# Altium PCB PCB1.PcbDoc (part 2 of 3)
Units mil, origin at the board's own origin, x right, y up, seen from the top; angles counter-clockwise.
Board outline 2830 x 1100 mil, 4 copper layers (L1, L2, L3, L4), stack 61.583 mil thick; 64 components, 73 nets, 315 pads, 162 vias.
Unrouted connection lines stored in the file: 1.
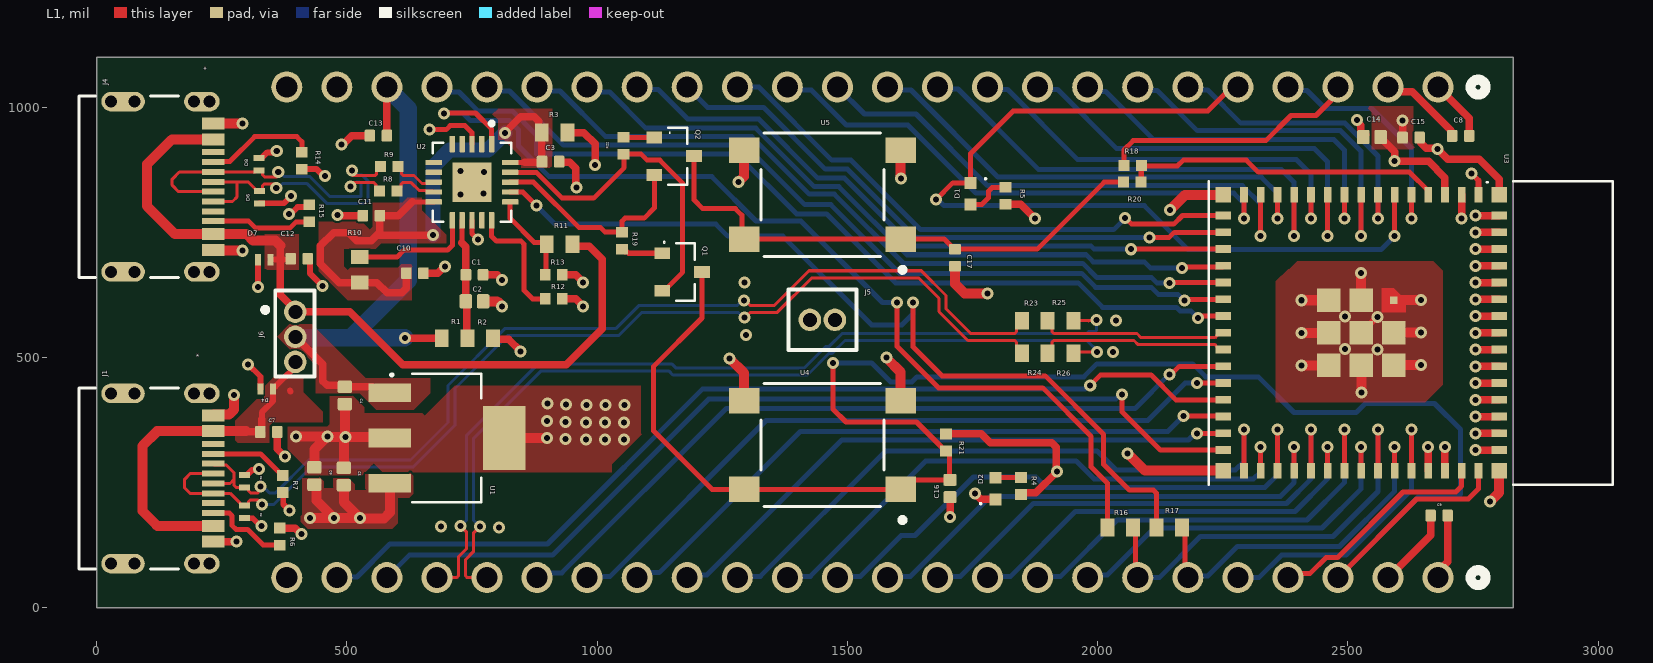
[diagram p0: L1 view]

## Part data (continued)
R8 R9 R18 R20: "62.5mW Thick Film Resistors 50V ±100ppm/℃ ±1% 27Ω 0402 Chip Resistor - Surface Mount ROHS", Case Code (Imperial)=0402, Case Code (Metric)=1005, Manufacturer="Yageo Group", Manufacturer Part Number=RC0402FR-0727RL, Manufacturer_Name=Yageo, Max Operating Temperature=155°C, Max Power Dissipation=63mW, Min Operating Temperature=-55°C, Power Rating=62.5mW, Resistance=27Ω, Temperature Coefficient=100ppm/°C, Tolerance=1%, Voltage Rating=50V, Case/Package=0402, Category="Chip SMD Resistors", China RoHS=Non-Compliant, ComponentLink1Description=https://datasheet.octopart.com:443/RC0402FR-0727RL-Yageo-datasheet-175887523.pdf?src-supplier=Newark, ComponentLink1URL=https://datasheet.octopart.com:443/RC0402FR-0727RL-Yageo-datasheet-175887523.pdf?src-supplier=Newark, ComponentLink2Description=https://datasheet.octopart.com:443/RC0402FR-0727RL-Yageo-datasheet-8324527.pdf?src-supplier=Newark, ComponentLink2URL=https://datasheet.octopart.com:443/RC0402FR-0727RL-Yageo-datasheet-8324527.pdf?src-supplier=Newark, ComponentLink3Description=https://datasheet.octopart.com:443/RC0402FR-0727RL-Yageo-datasheet-103092701.pdf?src-supplier=Upverter, ComponentLink3URL=https://datasheet.octopart.com:443/RC0402FR-0727RL-Yageo-datasheet-103092701.pdf?src-supplier=Upverter, ComponentLink4Description=https://datasheet.octopart.com:443/RC0402FR-0727RL-Yageo-datasheet-10408619.pdf?src-supplier=element14+APAC, ComponentLink4URL=https://datasheet.octopart.com:443/RC0402FR-0727RL-Yageo-datasheet-10408619.pdf?src-supplier=element14+APAC, ComponentLink5Description=https://datasheet.octopart.com:443/RC0402FR-0727RL-Yageo-datasheet-62067350.pdf?src-supplier=element14+APAC, ComponentLink5URL=https://datasheet.octopart.com:443/RC0402FR-0727RL-Yageo-datasheet-62067350.pdf?src-supplier=element14+APAC, ComponentLink6Description=https://datasheet.octopart.com:443/RC0402FR-0727RL-Yageo-Group-datasheet-189192902.pdf?src-supplier=LCSC, ComponentLink6URL=https://datasheet.octopart.com:443/RC0402FR-0727RL-Yageo-Group-datasheet-189192902.pdf?src-supplier=LCSC, ComponentLink7Description=https://datasheet.octopart.com:443/RC0402FR-0727RL-Yageo-Group-datasheet-176638170.pdf?src-supplier=Future+Electronics, ComponentLink7URL=https://datasheet.octopart.com:443/RC0402FR-0727RL-Yageo-Group-datasheet-176638170.pdf?src-supplier=Future+Electronics, ComponentLink8Description=https://datasheet.octopart.com:443/RC0402FR-0727RL-Yageo-datasheet-164759695.pdf?src-supplier=Future+Electronics, ComponentLink8URL=https://datasheet.octopart.com:443/RC0402FR-0727RL-Yageo-datasheet-164759695.pdf?src-supplier=Future+Electronics, ComponentLink9Description=https://datasheet.octopart.com:443/RC0402FR-0727RL-Yageo-datasheet-137700087.pdf?src-supplier=Future+Electronics, ComponentLink9URL=https://datasheet.octopart.com:443/RC0402FR-0727RL-Yageo-datasheet-137700087.pdf?src-supplier=Future+Electronics, ComponentLink10Description=https://datasheet.octopart.com:443/RC0402FR-0727RL-Yageo-datasheet-12531192.pdf?src-supplier=Future+Electronics, ComponentLink10URL=https://datasheet.octopart.com:443/RC0402FR-0727RL-Yageo-datasheet-12531192.pdf?src-supplier=Future+Electronics, ComponentLink11Description=https://datasheet.octopart.com:443/RC0402FR-0727RL-Yageo-datasheet-175423674.pdf?src-supplier=SOS+electronic, ComponentLink11URL=https://datasheet.octopart.com:443/RC0402FR-0727RL-Yageo-datasheet-175423674.pdf?src-supplier=SOS+electronic, ComponentLink12Description=https://datasheet.octopart.com:443/RC0402FR-0727RL-Yageo-datasheet-8329306.pdf?src-supplier=SOS+electronic, ComponentLink12URL=https://datasheet.octopart.com:443/RC0402FR-0727RL-Yageo-datasheet-8329306.pdf?src-supplier=SOS+electronic, ComponentLink13Description=https://datasheet.octopart.com:443/RC0402FR-0727RL-Yageo-datasheet-148775077.pdf?src-supplier=TME, ComponentLink13URL=https://datasheet.octopart.com:443/RC0402FR-0727RL-Yageo-datasheet-148775077.pdf?src-supplier=TME, ComponentLink14Description=https://datasheet.octopart.com/RC0402FR-0727RL-Yageo-datasheet-73766026.pdf, ComponentLink14URL=https://datasheet.octopart.com/RC0402FR-0727RL-Yageo-datasheet-73766026.pdf, ComponentLink15Description=http://sigma.octopart.com:80/conflict_mineral_statement/Yageo-company-3.pdf?src-supplier=Compliance+Statements, ComponentLink15URL=http://sigma.octopart.com:80/conflict_mineral_statement/Yageo-company-3.pdf?src-supplier=Compliance+Statements, ComponentLink16Description=http://sigma.octopart.com:80/rohs_statement/Yageo-company-2.pdf?src-supplier=Compliance+Statements, ComponentLink16URL=http://sigma.octopart.com:80/rohs_statement/Yageo-company-2.pdf?src-supplier=Compliance+Statements, Composition="Thick Film", Copyright="Copyright (C) 2025 Ultra Librarian. All rights reserved.", Country of Origin="Mainland China, Taiwan", Depth=500µm, Export Control Classification Number (ECCN) Code=EAR99, Features="Moisture Resistant", Harmonized Tariff Schedule (HTS) Code=8533.21.00.30, Height=350µm, Introduction Date=2008-07-18, Lead Free="Lead Free", Length=1mm, Lifecycle Status=Production, Manufacturer_Part_Number=RC0402FR-0727RL, Military Standard=Not, Mount="Surface Mount", Number of Pins=2, Number of Terminals=2, Number of Terminations=2, Pricing 1="100=0.004, 1000=0.004, 2000=0.003, 5000=0.003 (GBP)", REACH SVHC=Yes, RoHS=Compliant, Schedule B="8533210045, 8533210045|8533210045, 8533210045|8533210045|8533210045, 8533210045|8533210045|8533210045|8533210045", Stock 1=21500, Supplier 1=RS, Termination=SMD/SMT, Voltage Rating (AC)=50V, Voltage Rating (DC)=50V, Weight=652.039032µg, Width=500µm, Working Voltage=50V
R11: library part RC0402FR-074K7L, "4.7 kOhms ±1% 0.063W, 1/16W Chip Resistor 0402 (1005 Metric) Moisture Resistant Thick Film", Case Code (Imperial)=0402, Case Code (Metric)=1005, Manufacturer="Yageo Group", Max Operating Temperature=155°C, Min Operating Temperature=-55°C, Package="1005 Panasonic Electronic Components", Power Rating=62.5mW, Resistance=4.7kΩ, Supplier Part Number 1=1987816P, Temperature Coefficient=100ppm/°C, Tolerance=1%, Voltage Rating=50V, Case/Package=0402, Category="Chip SMD Resistors", Check_prices=https://www.snapeda.com/parts/RC0402FR-074K7L/Yageo/view-part/?ref=eda, China RoHS=Non-Compliant, ComponentLink1Description=https://datasheet.octopart.com:443/RC0402FR-074K7L-Yageo-datasheet-175887523.pdf?src-supplier=IHS, ComponentLink1URL=https://datasheet.octopart.com:443/RC0402FR-074K7L-Yageo-datasheet-175887523.pdf?src-supplier=IHS, ComponentLink2Description=https://datasheet.octopart.com:443/RC0402FR-074K7L-Yageo-datasheet-103092701.pdf?src-supplier=Upverter, ComponentLink2URL=https://datasheet.octopart.com:443/RC0402FR-074K7L-Yageo-datasheet-103092701.pdf?src-supplier=Upverter, ComponentLink3Description=https://datasheet.octopart.com:443/RC0402FR-074K7L-Yageo-datasheet-98239111.pdf?src-supplier=Upverter, ComponentLink3URL=https://datasheet.octopart.com:443/RC0402FR-074K7L-Yageo-datasheet-98239111.pdf?src-supplier=Upverter, ComponentLink4Description=https://datasheet.octopart.com:443/RC0402FR-074K7L-Yageo-Group-datasheet-190305687.pdf?src-supplier=Future+Electronics, ComponentLink4URL=https://datasheet.octopart.com:443/RC0402FR-074K7L-Yageo-Group-datasheet-190305687.pdf?src-supplier=Future+Electronics, ComponentLink5Description=https://datasheet.octopart.com:443/RC0402FR-074K7L-Yageo-datasheet-164759695.pdf?src-supplier=Future+Electronics, ComponentLink5URL=https://datasheet.octopart.com:443/RC0402FR-074K7L-Yageo-datasheet-164759695.pdf?src-supplier=Future+Electronics, ComponentLink6Description=https://datasheet.octopart.com:443/RC0402FR-074K7L-Yageo-datasheet-137700087.pdf?src-supplier=Future+Electronics, ComponentLink6URL=https://datasheet.octopart.com:443/RC0402FR-074K7L-Yageo-datasheet-137700087.pdf?src-supplier=Future+Electronics, ComponentLink7Description=https://datasheet.octopart.com:443/RC0402FR-074K7L-Yageo-datasheet-10408619.pdf?src-supplier=element14+APAC, ComponentLink7URL=https://datasheet.octopart.com:443/RC0402FR-074K7L-Yageo-datasheet-10408619.pdf?src-supplier=element14+APAC, ComponentLink8Description=https://datasheet.octopart.com:443/RC0402FR-074K7L-Yageo-datasheet-13691069.pdf?src-supplier=element14+APAC, ComponentLink8URL=https://datasheet.octopart.com:443/RC0402FR-074K7L-Yageo-datasheet-13691069.pdf?src-supplier=element14+APAC, ComponentLink9Description=https://datasheet.octopart.com:443/RC0402FR-074K7L-Yageo-datasheet-12531192.pdf?src-supplier=Newark, ComponentLink9URL=https://datasheet.octopart.com:443/RC0402FR-074K7L-Yageo-datasheet-12531192.pdf?src-supplier=Newark, ComponentLink10Description=https://datasheet.octopart.com:443/RC0402FR-074K7L-Yageo-datasheet-8324527.pdf?src-supplier=Newark, ComponentLink10URL=https://datasheet.octopart.com:443/RC0402FR-074K7L-Yageo-datasheet-8324527.pdf?src-supplier=Newark, ComponentLink11Description=https://datasheet.octopart.com:443/RC0402FR-074K7L-Yageo-Group-datasheet-190051977.pdf?src-supplier=Newark, ComponentLink11URL=https://datasheet.octopart.com:443/RC0402FR-074K7L-Yageo-Group-datasheet-190051977.pdf?src-supplier=Newark, ComponentLink12Description=https://datasheet.octopart.com:443/RC0402FR-074K7L-Yageo-datasheet-62067350.pdf?src-supplier=Farnell, ComponentLink12URL=https://datasheet.octopart.com:443/RC0402FR-074K7L-Yageo-datasheet-62067350.pdf?src-supplier=Farnell, ComponentLink13Description=https://datasheet.octopart.com:443/RC0402FR-074K7L-Yageo-datasheet-8329306.pdf?src-supplier=element14, ComponentLink13URL=https://datasheet.octopart.com:443/RC0402FR-074K7L-Yageo-datasheet-8329306.pdf?src-supplier=element14, ComponentLink14Description=https://datasheet.octopart.com:443/RC0402FR-074K7L-Yageo-Group-datasheet-189192902.pdf?src-supplier=LCSC, ComponentLink14URL=https://datasheet.octopart.com:443/RC0402FR-074K7L-Yageo-Group-datasheet-189192902.pdf?src-supplier=LCSC, ComponentLink15Description=https://datasheet.octopart.com:443/RC0402FR-074K7L-Yageo-datasheet-175423674.pdf?src-supplier=SOS+electronic, ComponentLink15URL=https://datasheet.octopart.com:443/RC0402FR-074K7L-Yageo-datasheet-175423674.pdf?src-supplier=SOS+electronic, ComponentLink16Description=https://datasheet.octopart.com:443/RC0402FR-074K7L-Yageo-datasheet-79472498.pdf?src-supplier=Megastar, ComponentLink16URL=https://datasheet.octopart.com:443/RC0402FR-074K7L-Yageo-datasheet-79472498.pdf?src-supplier=Megastar, ComponentLink17Description=https://datasheet.octopart.com/RC0402FR-074K7L-Yageo-datasheet-73766026.pdf, ComponentLink17URL=https://datasheet.octopart.com/RC0402FR-074K7L-Yageo-datasheet-73766026.pdf, ComponentLink18Description=http://sigma.octopart.com:80/conflict_mineral_statement/Yageo-company-3.pdf?src-supplier=Compliance+Statements, ComponentLink18URL=http://sigma.octopart.com:80/conflict_mineral_statement/Yageo-company-3.pdf?src-supplier=Compliance+Statements, ComponentLink19Description=http://sigma.octopart.com:80/rohs_statement/Yageo-company-2.pdf?src-supplier=Compliance+Statements, ComponentLink19URL=http://sigma.octopart.com:80/rohs_statement/Yageo-company-2.pdf?src-supplier=Compliance+Statements, Composition="Thick Film", Country of Origin="Mainland China, Taiwan", Depth=500µm, Export Control Classification Number (ECCN) Code=EAR99, Harmonized Tariff Schedule (HTS) Code=8533.21.00.30, Height=350µm, Introduction Date=2008-07-18, Lead Free="Lead Free", Length=1mm, Lifecycle Status=Production, Manufacturer Part Number=RC0402FR-074K7L, MF=Yageo, Military Standard=Not, Mount="Surface Mount", MP=RC0402FR-074K7L, Number of Pins=2, Number of Terminals=2, Packaging="Tape & Reel", Pricing 1="500=0.004, 1000=0.004, 2500=0.003, 5000=0.003 (GBP)", REACH SVHC=Yes, RoHS=Compliant, Schedule B="8533210045, 8533210045|8533210045, 8533210045|8533210045|8533210045, 8533210045|8533210045|8533210045|8533210045", SnapEDA_Link=https://www.snapeda.com/parts/RC0402FR-074K7L/Yageo/view-part/?ref=snap, Stock 1=5100, Supplier 1=RS, Termination=SMD/SMT, Voltage Rating (AC)=50V, Voltage Rating (DC)=50V, Width=500µm, Working Voltage=50V
R12 R13 R19 R22: library part AC0402FR-0710KL, "Res Thick Film 0402 10K Ohm 1% 0.063W(1/16W) ±100ppm/C Pad SMD T/R Automotive AEC-Q200", Case Code (Imperial)=0402, Case Code (Metric)=1005, Manufacturer="Yageo Group", Max Operating Temperature=155°C, Max Power Dissipation=63mW, Min Operating Temperature=-55°C, Package="1005 Yageo", Power Rating=62.5mW, Ratings=AEC-Q200, Resistance=10kΩ, Supplier Part Number 1=1977966P, Temperature Coefficient=100ppm/°C, Tolerance=1%, Voltage Rating=50V, Case/Package=0402, Category="Chip SMD Resistors", Check_prices=https://www.snapeda.com/parts/AC0402FR-0710KL/Yageo/view-part/?ref=eda, China RoHS=Non-Compliant, ComponentLink1Description=https://datasheet.octopart.com:443/AC0402FR-0710KL-Yageo-datasheet-182189377.pdf?src-supplier=IHS, ComponentLink1URL=https://datasheet.octopart.com:443/AC0402FR-0710KL-Yageo-datasheet-182189377.pdf?src-supplier=IHS, ComponentLink2Description=https://datasheet.octopart.com:443/AC0402FR-0710KL-Yageo-datasheet-83209224.pdf?src-supplier=Upverter, ComponentLink2URL=https://datasheet.octopart.com:443/AC0402FR-0710KL-Yageo-datasheet-83209224.pdf?src-supplier=Upverter, ComponentLink3Description=https://datasheet.octopart.com:443/AC0402FR-0710KL-Yageo-datasheet-178509465.pdf?src-supplier=Newark, ComponentLink3URL=https://datasheet.octopart.com:443/AC0402FR-0710KL-Yageo-datasheet-178509465.pdf?src-supplier=Newark, ComponentLink4Description=https://datasheet.octopart.com:443/AC0402FR-0710KL-Yageo-datasheet-166720450.pdf?src-supplier=JRH+Electronics, ComponentLink4URL=https://datasheet.octopart.com:443/AC0402FR-0710KL-Yageo-datasheet-166720450.pdf?src-supplier=JRH+Electronics, ComponentLink5Description=https://datasheet.octopart.com:443/AC0402FR-0710KL-Yageo-datasheet-151884373.pdf?src-supplier=Future+Electronics, ComponentLink5URL=https://datasheet.octopart.com:443/AC0402FR-0710KL-Yageo-datasheet-151884373.pdf?src-supplier=Future+Electronics, ComponentLink6Description=https://datasheet.octopart.com:443/AC0402FR-0710KL-Yageo-Group-datasheet-189830439.pdf?src-supplier=Future+Electronics, ComponentLink6URL=https://datasheet.octopart.com:443/AC0402FR-0710KL-Yageo-Group-datasheet-189830439.pdf?src-supplier=Future+Electronics, ComponentLink7Description=https://datasheet.octopart.com:443/AC0402FR-0710KL-Yageo-datasheet-137699919.pdf?src-supplier=Future+Electronics, ComponentLink7URL=https://datasheet.octopart.com:443/AC0402FR-0710KL-Yageo-datasheet-137699919.pdf?src-supplier=Future+Electronics, ComponentLink8Description=https://datasheet.octopart.com:443/AC0402FR-0710KL-Yageo-datasheet-24580492.pdf?src-supplier=Future+Electronics, ComponentLink8URL=https://datasheet.octopart.com:443/AC0402FR-0710KL-Yageo-datasheet-24580492.pdf?src-supplier=Future+Electronics, ComponentLink9Description=https://datasheet.octopart.com:443/AC0402FR-0710KL-Yageo-datasheet-13029202.pdf?src-supplier=Future+Electronics, ComponentLink9URL=https://datasheet.octopart.com:443/AC0402FR-0710KL-Yageo-datasheet-13029202.pdf?src-supplier=Future+Electronics, ComponentLink10Description=https://datasheet.octopart.com/AC0402FR-0710KL-Yageo-datasheet-12512238.pdf, ComponentLink10URL=https://datasheet.octopart.com/AC0402FR-0710KL-Yageo-datasheet-12512238.pdf, ComponentLink11Description=https://datasheet.octopart.com:443/AC0402FR-0710KL-Yageo-Group-datasheet-164768995.pdf?src-supplier=ODG+(Origin+Data+Global), ComponentLink11URL=https://datasheet.octopart.com:443/AC0402FR-0710KL-Yageo-Group-datasheet-164768995.pdf?src-supplier=ODG+(Origin+Data+Global), ComponentLink12Description=https://datasheet.octopart.com:443/AC0402FR-0710KL-Yageo-datasheet-128677448.pdf?src-supplier=X-ON, ComponentLink12URL=https://datasheet.octopart.com:443/AC0402FR-0710KL-Yageo-datasheet-128677448.pdf?src-supplier=X-ON, ComponentLink13Description=http://sigma.octopart.com:80/conflict_mineral_statement/Yageo-company-3.pdf?src-supplier=Compliance+Statements, ComponentLink13URL=http://sigma.octopart.com:80/conflict_mineral_statement/Yageo-company-3.pdf?src-supplier=Compliance+Statements, ComponentLink14Description=http://sigma.octopart.com:80/rohs_statement/Yageo-company-2.pdf?src-supplier=Compliance+Statements, ComponentLink14URL=http://sigma.octopart.com:80/rohs_statement/Yageo-company-2.pdf?src-supplier=Compliance+Statements, Composition="Thick Film", Country of Origin="Mainland China, Taiwan", Depth=500µm, Digi-Key_Part_Number=YAG3436TR-ND, Export Control Classification Number (ECCN) Code=EAR99, Features="Automotive AEC-Q200, Moisture Resistant", Harmonized Tariff Schedule (HTS) Code=8533.21.00.30, Height=320µm, Introduction Date=2012-04-10, Lead Free="Lead Free", Length=1mm, Lifecycle Status=Production, Manufacturer Part Number=AC0402FR-0710KL, MF=Yageo, Military Standard=Not, Mount="Surface Mount", MP=AC0402FR-0710KL, Number of Terminals=2, Number of Terminations=2, Packaging="Tape & Reel", Pricing 1="1000=0.004, 2500=0.003, 5000=0.003 (GBP)", Purchase-URL=https://pricing.snapeda.com/search/part/AC0402FR-0710KL/?ref=eda, REACH SVHC=Yes, RoHS=Compliant, Schedule B="8533210045, 8533210045|8533210045|8533210045|8533210045|8533210045|8533210045|8533210045|8533210045|8533210045|8533210045|8533210045|8533210045|8533210045|8533210045|8533210045|8533210045|8533210045|8533210045|8533210045, 8533210045|8533210045|8533210045|8533210045|8533210045|8533210045|8533210045|8533210045|8533210045|8533210045|8533210045|8533210045|8533210045|8533210045|8533210045|8533210045|8533210045|8533210045|8533210045|8533210045|8533210045|8533210045|8533210045|85", SnapEDA_Link=https://www.snapeda.com/parts/AC0402FR-0710KL/Yageo/view-part/?ref=snap, Stock 1=244500, Supplier 1=RS, Termination=SMD/SMT, Width=500µm, Working Voltage=50V
R21: "Res Thick Film 0402 10K Ohm 1% 0.063W(1/16W) ±100ppm/C Pad SMD T/R Automotive AEC-Q200", Case Code (Imperial)=0402, Case Code (Metric)=1005, Manufacturer="Yageo Group", Manufacturer Part Number=AC0402FR-0710KL, Max Operating Temperature=155°C, Max Power Dissipation=63mW, Min Operating Temperature=-55°C, Package="1005 Yageo", Power Rating=62.5mW, Ratings=AEC-Q200, Resistance=10kΩ, Temperature Coefficient=100ppm/°C, Tolerance=1%, Voltage Rating=50V, Case/Package=0402, Category="Chip SMD Resistors", Check_prices=https://www.snapeda.com/parts/AC0402FR-0710KL/Yageo/view-part/?ref=eda, China RoHS=Non-Compliant, ComponentLink1Description=https://datasheet.octopart.com:443/AC0402FR-0710KL-Yageo-datasheet-182189377.pdf?src-supplier=IHS, ComponentLink1URL=https://datasheet.octopart.com:443/AC0402FR-0710KL-Yageo-datasheet-182189377.pdf?src-supplier=IHS, ComponentLink2Description=https://datasheet.octopart.com:443/AC0402FR-0710KL-Yageo-datasheet-83209224.pdf?src-supplier=Upverter, ComponentLink2URL=https://datasheet.octopart.com:443/AC0402FR-0710KL-Yageo-datasheet-83209224.pdf?src-supplier=Upverter, ComponentLink3Description=https://datasheet.octopart.com:443/AC0402FR-0710KL-Yageo-datasheet-178509465.pdf?src-supplier=Newark, ComponentLink3URL=https://datasheet.octopart.com:443/AC0402FR-0710KL-Yageo-datasheet-178509465.pdf?src-supplier=Newark, ComponentLink4Description=https://datasheet.octopart.com:443/AC0402FR-0710KL-Yageo-datasheet-166720450.pdf?src-supplier=JRH+Electronics, ComponentLink4URL=https://datasheet.octopart.com:443/AC0402FR-0710KL-Yageo-datasheet-166720450.pdf?src-supplier=JRH+Electronics, ComponentLink5Description=https://datasheet.octopart.com:443/AC0402FR-0710KL-Yageo-datasheet-151884373.pdf?src-supplier=Future+Electronics, ComponentLink5URL=https://datasheet.octopart.com:443/AC0402FR-0710KL-Yageo-datasheet-151884373.pdf?src-supplier=Future+Electronics, ComponentLink6Description=https://datasheet.octopart.com:443/AC0402FR-0710KL-Yageo-Group-datasheet-189830439.pdf?src-supplier=Future+Electronics, ComponentLink6URL=https://datasheet.octopart.com:443/AC0402FR-0710KL-Yageo-Group-datasheet-189830439.pdf?src-supplier=Future+Electronics, ComponentLink7Description=https://datasheet.octopart.com:443/AC0402FR-0710KL-Yageo-datasheet-137699919.pdf?src-supplier=Future+Electronics, ComponentLink7URL=https://datasheet.octopart.com:443/AC0402FR-0710KL-Yageo-datasheet-137699919.pdf?src-supplier=Future+Electronics, ComponentLink8Description=https://datasheet.octopart.com:443/AC0402FR-0710KL-Yageo-datasheet-24580492.pdf?src-supplier=Future+Electronics, ComponentLink8URL=https://datasheet.octopart.com:443/AC0402FR-0710KL-Yageo-datasheet-24580492.pdf?src-supplier=Future+Electronics, ComponentLink9Description=https://datasheet.octopart.com:443/AC0402FR-0710KL-Yageo-datasheet-13029202.pdf?src-supplier=Future+Electronics, ComponentLink9URL=https://datasheet.octopart.com:443/AC0402FR-0710KL-Yageo-datasheet-13029202.pdf?src-supplier=Future+Electronics, ComponentLink10Description=https://datasheet.octopart.com/AC0402FR-0710KL-Yageo-datasheet-12512238.pdf, ComponentLink10URL=https://datasheet.octopart.com/AC0402FR-0710KL-Yageo-datasheet-12512238.pdf, ComponentLink11Description=https://datasheet.octopart.com:443/AC0402FR-0710KL-Yageo-Group-datasheet-164768995.pdf?src-supplier=ODG+(Origin+Data+Global), ComponentLink11URL=https://datasheet.octopart.com:443/AC0402FR-0710KL-Yageo-Group-datasheet-164768995.pdf?src-supplier=ODG+(Origin+Data+Global), ComponentLink12Description=https://datasheet.octopart.com:443/AC0402FR-0710KL-Yageo-datasheet-128677448.pdf?src-supplier=X-ON, ComponentLink12URL=https://datasheet.octopart.com:443/AC0402FR-0710KL-Yageo-datasheet-128677448.pdf?src-supplier=X-ON, ComponentLink13Description=http://sigma.octopart.com:80/conflict_mineral_statement/Yageo-company-3.pdf?src-supplier=Compliance+Statements, ComponentLink13URL=http://sigma.octopart.com:80/conflict_mineral_statement/Yageo-company-3.pdf?src-supplier=Compliance+Statements, ComponentLink14Description=http://sigma.octopart.com:80/rohs_statement/Yageo-company-2.pdf?src-supplier=Compliance+Statements, ComponentLink14URL=http://sigma.octopart.com:80/rohs_statement/Yageo-company-2.pdf?src-supplier=Compliance+Statements, Composition="Thick Film", Country of Origin="Mainland China, Taiwan", Depth=500µm, Digi-Key_Part_Number=YAG3436TR-ND, Export Control Classification Number (ECCN) Code=EAR99, Features="Automotive AEC-Q200, Moisture Resistant", Harmonized Tariff Schedule (HTS) Code=8533.21.00.30, Height=320µm, Introduction Date=2012-04-10, Lead Free="Lead Free", Length=1mm, Lifecycle Status=Production, MF=Yageo, Military Standard=Not, Mount="Surface Mount", MP=AC0402FR-0710KL, Number of Terminals=2, Number of Terminations=2, Packaging="Tape & Reel", Pricing 1="1000=0.004, 2500=0.003, 5000=0.003 (GBP)", Purchase-URL=https://pricing.snapeda.com/search/part/AC0402FR-0710KL/?ref=eda, REACH SVHC=Yes, RoHS=Compliant, Schedule B="8533210045, 8533210045|8533210045|8533210045|8533210045|8533210045|8533210045|8533210045|8533210045|8533210045|8533210045|8533210045|8533210045|8533210045|8533210045|8533210045|8533210045|8533210045|8533210045|8533210045, 8533210045|8533210045|8533210045|8533210045|8533210045|8533210045|8533210045|8533210045|8533210045|8533210045|8533210045|8533210045|8533210045|8533210045|8533210045|8533210045|8533210045|8533210045|8533210045|8533210045|8533210045|8533210045|8533210045|85", SnapEDA_Link=https://www.snapeda.com/parts/AC0402FR-0710KL/Yageo/view-part/?ref=snap, Stock 1=244500, Supplier 1=RS, Termination=SMD/SMT, Width=500µm, Working Voltage=50V
U1: library part "Buck Converter-TL1963A-33DCYR", "1.5-A, 20-V, low-dropout voltage regulator with reverse current & reverse voltage protection", Case/Package=SOT-223, Dropout Voltage=340mV, Input Bias Current=1mA, Manufacturer="Texas Instruments", Manufacturer Lifecycle Status=ACTIVE, Max Input Voltage=20V, Max Operating Temperature=125°C, Max Output Current=1.5A, Max Output Voltage=3.3V, Min Current Limit=1.6A, Min Input Voltage=2.1V, Min Operating Temperature=-40°C, Package="SOT-223-4 Texas Instruments", Accuracy=3%, Category="LDO Voltage Regulators", Check_prices=https://www.snapeda.com/parts/TL1963A-33DCYR/Texas+Instruments/view-part/?ref=eda, ComponentLink1Description=https://datasheet.octopart.com:443/TL1963A-33DCYR-Texas-Instruments-datasheet-36835243.pdf?src-supplier=Texas+Instruments, ComponentLink1URL=https://datasheet.octopart.com:443/TL1963A-33DCYR-Texas-Instruments-datasheet-36835243.pdf?src-supplier=Texas+Instruments, ComponentLink2Description=https://octopart.com:443/opatz8j6/c1?t=Hla6m3XvXhAHWXVKFaaW_a5X2t9MRnRa9Rhg32bB7-hwkC5kX9UWqgC7Y0XrYvGCzNw9F2GObv8rEO-_LT96r6t0WMtukZN5Zo-nq_t87TxK0aQbKY91dBY4VT4MYi1Trr0EtuGG53Jf1i-uWVif2ew3d4RaOZdf2PvGRtwv9uNs8uUNic6RvMbd-eB31s7G4Af3zS_TEzGuMkBAOoi9md3ZWSInE29ONXSk8OqzIHhpOUXvcDzV6Hao5nUAphUde-AL1MLKmQaW4RGiw94fQFK4e-Tgx16sbdcLKFmZowjD_ELyKtjWJkkBJ5BqY-LGJ7enmvKDFx3mRFCAvZkcEEaPzY6WYb0LtuKFQJ6UuQNRqLPd-hOLSDp-cdVvlre_9DiWJlg&src-supplier=Texas+Instruments, ComponentLink2URL=https://octopart.com:443/opatz8j6/c1?t=Hla6m3XvXhAHWXVKFaaW_a5X2t9MRnRa9Rhg32bB7-hwkC5kX9UWqgC7Y0XrYvGCzNw9F2GObv8rEO-_LT96r6t0WMtukZN5Zo-nq_t87TxK0aQbKY91dBY4VT4MYi1Trr0EtuGG53Jf1i-uWVif2ew3d4RaOZdf2PvGRtwv9uNs8uUNic6RvMbd-eB31s7G4Af3zS_TEzGuMkBAOoi9md3ZWSInE29ONXSk8OqzIHhpOUXvcDzV6Hao5nUAphUde-AL1MLKmQaW4RGiw94fQFK4e-Tgx16sbdcLKFmZowjD_ELyKtjWJkkBJ5BqY-LGJ7enmvKDFx3mRFCAvZkcEEaPzY6WYb0LtuKFQJ6UuQNRqLPd-hOLSDp-cdVvlre_9DiWJlg&src-supplier=Texas+Instruments, ComponentLink3Description=https://datasheet.octopart.com:443/TL1963A-33DCYR-Texas-Instruments-datasheet-10255270.pdf?src-supplier=Texas+Instruments, ComponentLink3URL=https://datasheet.octopart.com:443/TL1963A-33DCYR-Texas-Instruments-datasheet-10255270.pdf?src-supplier=Texas+Instruments, ComponentLink4Description=https://sigma.octopart.com:443/49253063/technical_drawing/Texas-Instruments-TL1963A-33DCYR.pdf?src-supplier=Texas+Instruments, ComponentLink4URL=https://sigma.octopart.com:443/49253063/technical_drawing/Texas-Instruments-TL1963A-33DCYR.pdf?src-supplier=Texas+Instruments, ComponentLink5Description=https://datasheet.octopart.com:443/TL1963A-33DCYR-Texas-Instruments-datasheet-159117591.pdf?src-supplier=Augswan, ComponentLink5URL=https://datasheet.octopart.com:443/TL1963A-33DCYR-Texas-Instruments-datasheet-159117591.pdf?src-supplier=Augswan, ComponentLink6Description=https://datasheet.octopart.com:443/TL1963A-33DCYR-Texas-Instruments-datasheet-21820479.pdf?src-supplier=Newark, ComponentLink6URL=https://datasheet.octopart.com:443/TL1963A-33DCYR-Texas-Instruments-datasheet-21820479.pdf?src-supplier=Newark, ComponentLink7Description=https://datasheet.octopart.com:443/TL1963A-33DCYR-Texas-Instruments-datasheet-16079880.pdf?src-supplier=Farnell, ComponentLink7URL=https://datasheet.octopart.com:443/TL1963A-33DCYR-Texas-Instruments-datasheet-16079880.pdf?src-supplier=Farnell, ComponentLink8Description=https://datasheet.octopart.com:443/TL1963A-33DCYR-Texas-Instruments-datasheet-14171511.pdf?src-supplier=iiiC, ComponentLink8URL=https://datasheet.octopart.com:443/TL1963A-33DCYR-Texas-Instruments-datasheet-14171511.pdf?src-supplier=iiiC, ComponentLink9Description=http://sigma.octopart.com:80/reach_statement/Texas-Instruments-company-64.pdf?src-supplier=Compliance+Statements, ComponentLink9URL=http://sigma.octopart.com:80/reach_statement/Texas-Instruments-company-64.pdf?src-supplier=Compliance+Statements, ComponentLink10Description=http://sigma.octopart.com:80/conflict_mineral_statement/Texas-Instruments-company-63.pdf?src-supplier=Compliance+Statements, ComponentLink10URL=http://sigma.octopart.com:80/conflict_mineral_statement/Texas-Instruments-company-63.pdf?src-supplier=Compliance+Statements, Contact Plating=Tin, Height=1.8mm, Lead Free="Lead Free", Length=6.5mm, Lifecycle Status=Production, Manufacturer Part Number=TL1963A-33DCYR, MF="Texas Instruments", Min Output Voltage=3.3V, MP=TL1963A-33DCYR, Nominal Output Voltage=3.3V, Number of Outputs=1, Number of Pins=4, Number of Regulators=1, Output Current=1.5A, Output Type=Fixed, Output Voltage=3.3V, Polarity=Positive, Pricing 1="2500=1.667 (USD)", Quiescent Current=1mA, Radiation Hardening=No, REACH SVHC=No, RoHS=Compliant, Schedule B="8542390000, 8542390000|8542390000|8542390000|8542390000|8542390000", SnapEDA_Link=https://www.snapeda.com/parts/TL1963A-33DCYR/Texas+Instruments/view-part/?ref=snap, Stock 1=20000, Supplier 1="Arrow Electronics", Thickness=1.6mm, Width=3.5mm
U2: library part "USB to UART", "IC USB SERIAL FULL UART 20QFN", Package=None, Availability=Unavailable, MP=FT231XQ-R, Price=None
U3: "ESP32-S3-MINI-1-N8 RF TXRX MOD BT WIFI PCB TH SMD", Manufacturer="Espressif Systems", Package=None, Supplier Part Number 1=5407-ESP32-S3-MINI-1-N8CT-ND, Availability=Unavailable, Category="RF Transceiver Modules and Modems", ComponentLink1Description=https://datasheet.octopart.com:443/ESP32-S3-MINI-1-N8-Espressif-Systems-datasheet-194171672.pdf?src-supplier=LCSC, ComponentLink1URL=https://datasheet.octopart.com:443/ESP32-S3-MINI-1-N8-Espressif-Systems-datasheet-194171672.pdf?src-supplier=LCSC, ComponentLink2Description=https://datasheet.octopart.com:443/ESP32-S3-MINI-1-N8-Espressif-Systems-datasheet-188867343.pdf?src-supplier=TME, ComponentLink2URL=https://datasheet.octopart.com:443/ESP32-S3-MINI-1-N8-Espressif-Systems-datasheet-188867343.pdf?src-supplier=TME, ComponentLink3Description=https://datasheet.octopart.com:443/ESP32-S3-MINI-1-N8-Espressif-Systems-datasheet-165560562.pdf?src-supplier=TME, ComponentLink3URL=https://datasheet.octopart.com:443/ESP32-S3-MINI-1-N8-Espressif-Systems-datasheet-165560562.pdf?src-supplier=TME, ComponentLink4Description=https://datasheet.octopart.com:443/ESP32-S3-MINI-1-N8-Espressif-Systems-datasheet-165560559.pdf?src-supplier=TME, ComponentLink4URL=https://datasheet.octopart.com:443/ESP32-S3-MINI-1-N8-Espressif-Systems-datasheet-165560559.pdf?src-supplier=TME, ComponentLink5Description=https://datasheet.octopart.com:443/ESP32-S3-MINI-1-N8-Espressif-Systems-datasheet-192318068.pdf?src-supplier=HQonline, ComponentLink5URL=https://datasheet.octopart.com:443/ESP32-S3-MINI-1-N8-Espressif-Systems-datasheet-192318068.pdf?src-supplier=HQonline, Manufacturer Part Number=ESP32-S3-MINI-1-N8, MF="{'manufacturer': u'Espressif Systems'}", MP=ESP32-S3-MINI-1-N8, Price=None, Pricing 1="1=5.43, 10=4.703, 25=4.4492, 100=4.0995, 250=3.89008 (USD)", RoHS=Compliant, Stock 1=4415, Supplier 1=DigiKey
U4 U5: library part Switch, "Switch Tactile N.O SPST Round Button Gull Wing 0.05A 12VDC 100000Cycle 1.57N SMD T/R", Case/Package=SMD/SMT, Color=Black, Contact Current Rating=50mA, Contact Resistance=100mΩ, Insulation Resistance=100GΩ, Manufacturer="C&K Components", Max Operating Temperature=60°C, Max Voltage Rating (DC)=12V, Min Operating Temperature=-20°C, Operating Force=1.57N, Actuator Length=850µm, Actuator Material="Nylon, Polyamide", Category="Tactile Switches", China RoHS=Compliant, ComponentLink1Description=https://datasheet.octopart.com:443/PTS645SM43SMTR92LFS-C%26K-Components-datasheet-169841344.pdf?src-supplier=Newark, ComponentLink1URL=https://datasheet.octopart.com:443/PTS645SM43SMTR92LFS-C%26K-Components-datasheet-169841344.pdf?src-supplier=Newark, ComponentLink2Description=https://datasheet.octopart.com:443/PTS645SM43SMTR92LFS-C%26K-Components-datasheet-41191814.pdf?src-supplier=Newark, ComponentLink2URL=https://datasheet.octopart.com:443/PTS645SM43SMTR92LFS-C%26K-Components-datasheet-41191814.pdf?src-supplier=Newark, ComponentLink3Description=https://datasheet.octopart.com:443/PTS645SM43SMTR92LFS-C%26K-Components-datasheet-67873720.pdf?src-supplier=Upverter, ComponentLink3URL=https://datasheet.octopart.com:443/PTS645SM43SMTR92LFS-C%26K-Components-datasheet-67873720.pdf?src-supplier=Upverter, ComponentLink4Description=https://datasheet.octopart.com:443/PTS645SM43SMTR92-LFS-C%26K-Components-datasheet-39117004.pdf?src-supplier=Upverter, ComponentLink4URL=https://datasheet.octopart.com:443/PTS645SM43SMTR92-LFS-C%26K-Components-datasheet-39117004.pdf?src-supplier=Upverter, ComponentLink5Description=https://datasheet.octopart.com:443/PTS645SM43SMTR92LFS-C%26K-Components-datasheet-165782998.pdf?src-supplier=Farnell, ComponentLink5URL=https://datasheet.octopart.com:443/PTS645SM43SMTR92LFS-C%26K-Components-datasheet-165782998.pdf?src-supplier=Farnell, ComponentLink6Description=https://datasheet.octopart.com:443/PTS645SM43SMTR92LFS-C%26K-Components-datasheet-110647872.pdf?src-supplier=HQonline, ComponentLink6URL=https://datasheet.octopart.com:443/PTS645SM43SMTR92LFS-C%26K-Components-datasheet-110647872.pdf?src-supplier=HQonline, ComponentLink7Description=https://datasheet.octopart.com:443/PTS645SM43SMTR92LFS-C%26K-Components-datasheet-24578962.pdf?src-supplier=Future+Electronics, ComponentLink7URL=https://datasheet.octopart.com:443/PTS645SM43SMTR92LFS-C%26K-Components-datasheet-24578962.pdf?src-supplier=Future+Electronics, ComponentLink8Description=https://datasheet.octopart.com:443/PTS645SM43SMTR92LFS-C%26K-Components-datasheet-138128951.pdf?src-supplier=Future+Electronics, ComponentLink8URL=https://datasheet.octopart.com:443/PTS645SM43SMTR92LFS-C%26K-Components-datasheet-138128951.pdf?src-supplier=Future+Electronics, ComponentLink9Description=https://datasheet.octopart.com:443/PTS645SM43SMTR92LFS-C%26K-Components-datasheet-62111174.pdf?src-supplier=Future+Electronics, ComponentLink9URL=https://datasheet.octopart.com:443/PTS645SM43SMTR92LFS-C%26K-Components-datasheet-62111174.pdf?src-supplier=Future+Electronics, ComponentLink10Description=https://datasheet.octopart.com:443/PTS645SM43SMTR92-LFS-C%26K-Components-datasheet-5331042.pdf?src-supplier=Future+Electronics, ComponentLink10URL=https://datasheet.octopart.com:443/PTS645SM43SMTR92-LFS-C%26K-Components-datasheet-5331042.pdf?src-supplier=Future+Electronics, ComponentLink11Description=https://datasheet.octopart.com:443/PTS645SM43SMTR92LFS-C%26K-Components-datasheet-62111384.pdf?src-supplier=Electro+Sonic, ComponentLink11URL=https://datasheet.octopart.com:443/PTS645SM43SMTR92LFS-C%26K-Components-datasheet-62111384.pdf?src-supplier=Electro+Sonic, ComponentLink12Description=https://datasheet.octopart.com:443/PTS645SM43SMTR92-LFS-C%26K-Components-datasheet-23707823.pdf?src-supplier=Electro+Sonic, ComponentLink12URL=https://datasheet.octopart.com:443/PTS645SM43SMTR92-LFS-C%26K-Components-datasheet-23707823.pdf?src-supplier=Electro+Sonic, ComponentLink13Description=https://datasheet.octopart.com:443/PTS645SM43SMTR92LFS-C%26K-Components-datasheet-44395798.pdf?src-supplier=Electro+Sonic, ComponentLink13URL=https://datasheet.octopart.com:443/PTS645SM43SMTR92LFS-C%26K-Components-datasheet-44395798.pdf?src-supplier=Electro+Sonic, ComponentLink14Description=http://sigma.octopart.com:80/reach_statement/ITT-company-18.pdf?src-supplier=Compliance+Statements, ComponentLink14URL=http://sigma.octopart.com:80/reach_statement/ITT-company-18.pdf?src-supplier=Compliance+Statements, Contact Material=Silver, Contact Plating=Silver, Copyright="Copyright (C) 2026 Ultra Librarian. All rights reserved.", Current Rating=50mA, Depth=9mm, Electrical Life=100kcycles, Height=3.45mm, Illumination Type="Illuminated, Non-Illuminated", Lead Free="Lead Free", Length=6mm, Life (Cycles)=100kcycles, Lifecycle Status=Production, Manufacturer Package Identifier=PTS645SM43SMTR92LFS, Manufacturer Part Number=PTS645SM43SMTR92LFS, Manufacturer_Name="C&K Components", Manufacturer_Part_Number=PTS645SM43SMTR92LFS, Max Current Rating=50mA, Mechanical Life=100kcycles, Mount="Surface Mount", Number of Positions=1, Orientation=Straight, Packaging="Cut Tape (CT)", Pricing 1="1000=0.102, 3000=0.0993, 5000=0.0981, 20000=0.0948, 30000=0.0927 (USD)", REACH SVHC=Yes, RefDes=RefDes, RoHS=Compliant, Stock 1=358000, Supplier 1="Future Electronics", Switch Function=Off-Mom, Termination=Solder, Throw Configuration=SPST, Type=Type, Voltage Rating (DC)=12V

## Via types
v1: diameter 24, hole 12, L1 to L4, tented both sides, 162 vias

## Nets (pads, with @x,y where several pads share a name; then routed paths per layer and width w, separated by ;. In a path a pad name is that pad's centre, name@x,y a point inside that pad or via, vN(x,y) a via of type N, cw(c..) or ccw(c..) an arc to the next point about the centre after c; other vN are vias at no path point)
+3V3: C8.2 C9.2 C14.2 C15.2 J2.2 J3.1 J5.2 R2.1 R3.2 R4.2 R5.2 R21.2 U3.3 | length 5504.1
  L1 w15: R2.1 796.46,538 798.46,536 823,536 v1(847,512) ; R3.2@940.59,948.83 973.46,948.83 996,926.29 v1(996,884) ; R21.2 1766.99,347.01 1785,329 1908.49,329 1917.28,320.21 1917.28,273.72 v1(1919,272) 1876.2,229.2 1850.13,229.2 R4.2 ; R5.2 1845.93,806.07 v1(1875,777) ; C14.2 2565.28,938.43 2593,910.71 v1(2593,892) 2661,892 2693.73,859.27 U3.3 ; J2.2 2588.99,1031.01 2627.99,1031.01 2704.86,954.14 2704.86,945.49 C8.2 ; C15.2 v1(2609,973) ; J3.1 2680,72.72 2699.01,91.73 C9.2
  L2 w40: v1(847,512) 847,676 919.43,748.43 919.43,859.02 944.41,884 v1(996,884) 1145.46,884 1147.46,886 1514,886 1627,773 1817,773 ; J5.2 1475,886 ; v1(1919,272) 1919,597 1817,699 1817,773 ; J2.2 2580,1034.05 2610,1004.05 ; v1(2609,973) 2610,974 2610,1004.05 ; J3.1 2481,259 2283.43,259 2239,303.43 2239,892 ; 1817,773 1871,773 v1(1875,777) 1990,892 2239,892 ; 2239,892 v1(2593,892) 2610,909 2610,1004.05
+3V3_FTDI: C3.2 C10.2 C11.2 R3.1 R10.1 U2.10 U2.20 | length 1214.5
  L1 w10: 631,811 631.37,810.63 U2.10 ; U2.20 854.37,889.37 855,890
  L1 w15: C10.2@618.79,668.2 C10.2 618.69,667.7 618.69,637.79 609.9,629 580.35,629 559.94,649.41 R10.1 484.59,649.41 447.21,686.79 447.21,723 473.49,749.28 503.44,749.28 519.72,733 549,733 560,744 ; 631,811 603,783 C11.2 566.01,750.01 560,744 ; v1(672,744) 560,744 ; v1(816,948) 816,949.46 846.97,980.43 874.34,980.43 883.13,971.64 883.13,955.28 889.7,948.71 889.7,892.71 886.99,890 855,890
  L4 w30: v1(672,744) 672,747.88 672.28,748.16 672.28,785.72 672,786 672,881 705.01,914.01 782.01,914.01 v1(816,948)
+3V3_REGULATOR: C5.2 C6.2 J5.1 U1.3 | length 1618.1
  L1 w20: v1(426,179) v1(474,179) ; C6.2 436.57,245.72 439.17,243.12 439.17,213.83 v1(474,179) ; C5.2 494,211 v1(526,179) ; U1.3 585.83,189.95 574.11,178.23 526.77,178.23 v1(526,179) ; v1(474,179) v1(526,179)
  L2 w40: v1(426,179) v1(474,179) 569,179 608,218 ; J5.1 1425,461 1426,460
  L2 w60: 608,218 1184,218 1426,460
+5V: C4.2 C13.2 J2.22 J6.2 R1.1 U1.1 | length 1210
  L1 w15: J6.2 452,486 452,452.79 460.79,444 493.28,444 C4.2 ; C4.2@496.63,441.92 C4.2 ; C13.2 J2.22 ; U1.1 582.2,429.55 562.2,429.55 550.47,441.28 C4.2 ; v1(616,539) 616.5,538.5 689.32,538.5 R1.1
  L4 w35: J6.2@399,539 508,539 ; J2.22 623,997 623,654 508,539 ; v1(616,539) 508,539
+5V_VBUS_1: C12.2 D7.1 J4.A4/B9 J4.B4/A9 J6.1 R11.2 | length 1619.7
  L1 w12: D7.1 347.5,696 367.25,696 386.99,696 C12.2
  L1 w15: 367.25,723 367.25,696 367.25,624.89 397,595.13 J6.1 506,591 612,485 938,485 1010,557 1010,696 984,722 954.59,722 R11.2
  L1 w20: J4.A4/B9 150.41,935.41 101,886 101,802 157,746 232.68,746 J4.B4/A9 299.57,746.43 313,733 357.25,733 367.25,723
+5V_VBUS_2: C7.2 D4.1 J1.A4/B9 J1.B4/A9 J6.3 | length 704
  L1 w12: 330.12,376.12 330.12,390.12 352.5,412.5 352.5,442 357.5,442 376.5,461 376.97,461 390.69,474.72 390.69,475.76 397,482.07 J6.3 ; 387.55,431.87 cw(c377.71,425) 387.6,431.8
  L1 w15: 299,353 301,351 C7.2 330.12,354.13 330.12,376.12
  L1 w20: J1.B4/A9 121.49,163.51 115.03,169.97 92,193 92,323.28 121.2,352.49 J1.A4/B9 298.49,352.49 299,353
+VCC_FTDI: C1.2 C2.2 R1.2 R2.2 U2.12 | length 240.7
  L1 w10.01: 730,729.37 730.32,729.68 U2.12
  L1 w15: 730,729.37 737.99,721.38 C1.2 737.85,664.86 737.85,612.14 C2.2 739.36,610.36 739.36,539.64 R2.2
BTN_GPIO0: C17.2 Q2.3 R20.1 U5.1 U5.2 | length 1066.9
  L1 w10: Q2.3 1193.76,814.24 1211,797 1276,797 1289,784 1289,740.92 U5.2 U5.1 1693.41,736.42 1713.82,716.01 C17.2 1879.01,716.01 2013,850 R20.1
CHIP_PU: C16.2 J3.3 Q1.3 R21.1 U3.45 U4.1 U4.2 | length 3605.6
  L1 w10: Q1.3 1209.53,578.53 1113,482 1113,353 1229.58,236.42 U4.2 U4.1 1625.28,255.2 C16.2 1703.81,256.39 1703.81,307.36 R21.1@1698.18,312.99 ; v1(1471,489) 1471,397 1497.19,370.81 1638,370.81 1695.82,312.99 R21.1 ; J3.3 2637,217 2740.32,217 2760.66,237.34 U3.45
  L4 w10: v1@1471.86,489 1548,489 1586,451 1629,451 1639,461 1972.3,461 1998.3,487 2189.8,487 2215.8,461 2321,461 2392,390 2516.27,390 2534.27,408 2673,408 2725,356 2725,226.86 2719.14,221 2641,221 J3.3
CON1_USB_N: D8.1 J4.A7 J4.B7 R8.1 | length 628.7
  L1 w6.03: J4.A7 163.92,831.08 151,844 151,856 165.45,870.45 J4.B7 316.95,870.45 320,873.5 D8.1 328.82,873.5 331.81,870.52 331.81,864.33 335.34,860.79 v1@360.86,860.79 ; v1@511.05,849 554.47,849 558,845.47 558,839.5 R8.1
  L4 w6.03: v1(363,870) 366.53,870 375.52,861.02 426.53,861.02 466.59,820.95 528.72,820.95 528.72,846.17 524.91,849.99 519.52,849.99 510.53,841 v1(507,841)
CON1_USB_P: D6.1 J4.A6 J4.B6 R9.1 | length 580.8
  L1 w6.03: J4.B6 271.39,811.39 281,821 281,850.76 ; J4.A6 281,850.76 ; v1@360.86,846.76 335.34,846.76 331.81,843.23 331.81,835.49 328.82,832.5 D6.1 321,832.5 302.74,850.76 281,850.76 ; v1@511.05,863.03 555.98,863.03 559.52,866.56 559.52,873.02 R9.1
  L4 w6.03: v1(359,838) 362.53,838 371.52,846.99 420.72,846.99 460.78,806.93 534.53,806.93 542.75,815.14 542.75,851.99 530.72,864.02 522.52,864.02 513.53,873 v1(510,873)
CON2_USB_N: D5.1 J1.A7 J1.B7 R23.1 | length 2027.3
  L1 w6.03: J1.A7 266.64,248.16 275,256.52 ; J1.B7 236.03,284.54 259.46,284.54 275,269 275,256.52 ; D5.1 D5.1@301,240.5 ; 323,229.52 307.52,229.52 303.99,233.05 303.99,237.52 D5.1@301,240.5 ; v1(1293,614) 1295.53,614 1305.52,604.02 1354.28,604.02 1423.31,673.05 1647.69,673.05 1696.99,623.75 1696.99,597.12 1746.4,547.71 1834.33,547.71 1837.86,551.24 1837.86,562.43 R23.1 ; 275,256.52 275,244.03 278.53,240.5 D5.1@301,240.5
  L4 w6.03: v1(328,242) 332.79,242 345.28,229.52 357.78,229.52 423.27,295 627,295 702,370 702,443.81 816.22,558.03 1038,558.03 1082.97,603 1083.99,604.02 1280.48,604.02 1290.47,614 v1(1293,614)
CON2_USB_P: D3.1 J1.A6 J1.B6 R24.1 | length 2095.7
  L1 w6.03: J1.A6 187.16,267.84 176,256.68 176,239 186.53,228.47 J1.B6 267.03,228.47 291,204.5 D3.1 301,204.5 303.99,207.49 303.99,211.95 307.52,215.49 323,215.49 ; v1(1294,580) 1296.53,580 1306.52,589.99 1360.09,589.99 1429.12,659.02 1641.88,659.02 1682.95,617.94 1682.95,591.31 1740.59,533.68 1834.33,533.68 1837.86,530.15 1837.86,518.96 R24.1
  L4 w6.03: v1@329.03,205 327,205 328,206 v1(331,206) 354.11,206 429.08,280.97 632.81,280.97 716.03,364.19 716.03,438 822.03,544 1043.81,544 1088.78,588.97 1089.8,589.99 1281.48,589.99 1291.47,580 v1(1294,580)
CON_ESP_USB_N: J3.21 R25.1 | length 1762.7
  L1 w6.03: J3.21 719.45,60 722.99,63.53 722.99,101.8 739.49,118.3 739.49,150.72 727.2,163 v1(727,163) ; R25.1 1981.8,573.2 ; 1982,573 1981.8,573.2 ; v1(1998,575) 1996.2,573.2 1981.8,573.2
  L4 w6.03: v1(727,163) 727.2,163 739.49,175.28 739.49,344.22 882.31,487.05 1148.86,487.05 1156.92,478.99 1414.25,478.99 1457.31,522.05 1463.79,522.05 1489.45,547.71 1978.27,547.71 1981.8,551.24 1994.47,551.24 1998,554.78 v1(1998,575)
CON_ESP_USB_P: J3.20 R26.1 | length 1728.9
  L1 w6.03: v1(766,162) 765.8,162 753.52,149.72 753.52,112.48 737.02,95.98 737.02,63.53 740.55,60 J3.20 ; R26.1 1954.35,511 v1(1999,511)
  L4 w6.03: v1(766,162) 765.8,162 753.52,174.28 753.52,338.41 888.12,473.02 1143.05,473.02 1151.11,464.95 1420.06,464.95 1463.12,508.02 1469.6,508.02 1495.26,533.68 1978.27,533.68 1999,512.95 v1(1999,511)
CON_GPIO0: J2.3 R18.1 | length 518.6
  L1 w10: R18.1 2052.5,914.5 2071,933 2336,933 2386,983 2436,983 2480,1027 J2.3
DTR_FTDI: Q2.2 R19.1 U2.18 | length 428.8
  L1 w10: U2.18 873,850 964,759 1007.18,759 1016.17,750.01 R19.1 1050,772.14 1055.86,778 1094,778 1114.24,798.24 Q2.2
ESP_USB_N: R23.2 R25.2 U3.23 | length 377.3
  L1 w6.03: R25.2 1908.76,564.8 1908.76,551.13 1912.29,547.6 2078.52,547.6 2086.69,539.42 2234.55,539.42 2238.09,542.96 2238.09,544.28 2242.94,549.14 U3.23
ESP_USB_P: R24.2 R26.2 U3.24 | length 377.2
  L1 w6.03: R26.2 1908.43,516.26 1908.43,530.03 1911.96,533.57 2072.71,533.57 2080.88,525.39 2234.55,525.39 2238.09,521.86 2238.09,520.54 2242.94,515.68 U3.24
FTDI_USB_N: R8.2 U2.9 | length 91.7
  L1 w6.03: R8.2 607.93,839.43 607.93,845.54 611.46,849.07 628.53,849.07 644.46,833.14 656.77,833.14 657.29,832.61 671.52,832.61 U2.9
FTDI_USB_P: R9.2 U2.8 | length 91.1
  L1 w6.03: R9.2 609.1,874.4 609.1,866.63 612.63,863.1 634.34,863.1 650.27,847.17 656.77,847.17 657.29,847.7 671.52,847.7 U2.8
GND: C1.1 C2.1 C3.1 C4.1 C5.1 C6.1 C7.1 C8.1 C9.1 C10.1 C11.1 C12.1 C13.1 C14.1 C15.1 C16.1 C17.1 D2.1 D3.2 D4.2 D5.2 D6.2 D7.2 D8.2 J1.A1/B12 J1.B1/A12 J2.1 J2.23 J3.2 J3.24 J4.A1/B12 J4.B1/A12 R6.1 R7.1 R12.1 R13.1 R14.1 R15.1 U1.2 U1.4 U2.3 U2.13 U2.21 U3.1 U3.2 U3.42 U3.43 U3.46 U3.47 U3.48 U3.49 U3.50 U3.51 U3.52 U3.53 U3.54 U3.55 U3.56 U3.57 U3.58 U3.59 U3.60 U3.61 U3.61_1 U3.61_2 U3.61_3 U3.61_4 U3.61_5 U3.61_6 U3.61_7 U3.61_8 U3.62 U3.63 U3.64 U3.65 U4.3 U4.4 U5.3 U5.4 | length 4759.4
  L1 w10.01: v1(665,955) 698.39,955 706.39,963 736,963 749.69,949.31 749.69,926.49 U2.3 ; U2.13 750,747 v1(762,735)
  L1 w11: D3.2 296.5,179 311.98,179 327.48,163.5 v1(329.24,163.5) ; D6.2 373.98,807.5 v1(388.48,822)
  L1 w11.5: v1(303,486) 327.5,461.5 D4.2 ; R7.1 372,226.11 373,225.11 373,206.51 385,194.51 v1(385,194)
  L1 w12: D5.2 301,265.5 310.2,274.7 322.7,274.7 v1(325,277) ; D7.2 322.5,641.5 v1(323,641) ; D8.2 330,898.5 341.2,909.7 357.7,909.7 v1(360,912) ; v1(384,786) 387.25,786 401.63,800.38 420.37,800.38 R15.1 ; R14.1 439.81,875.99 453.8,862 v1(456,862) ; C12.1 426.64,692.37 426.64,667.36 v1(451,643) ; U3.61 2558.27,581 v1(2559,581) ; v1(2747,867) 2760.66,853.34 U3.1
  L1 w15: J1.B1/A12 v1(280,132) ; C7.1 361.01,316.99 v1(376,302) ; R6.1 396.99,159.01 v1(409,147) ; v1(481,784) 482,783 C11.1 ; v1(489,925) 491.44,925 509.44,943 C13.1 ; C10.1 681.99,668 v1(695.99,682) ; C1.1 800,665 v1(810,655) ; C3.1 925.36,889.64 945.36,889.64 957.28,877.72 957.28,840.72 v1(959,839) ; R12.1 957,617 v1(972,602) ; R13.1 957,665 v1(972,650) ; v1(1705,181) C16.1 ; v1(1755,228) 1766.65,216.35 D2.1 ; v1(2518,974) 2518,971.56 2525.62,963.95 2525.62,945.1 C14.1 C14.1@2535.82,945.1 ; J3.2 2664.99,144.99 C9.1 C9.1@2664.69,183.7 ; C15.1 2645,937.01 2645,928.79 2656.06,917.72 2677.28,917.72 v1(2679,916) 2699.36,895.64 2762.36,895.64 2802,856 U3.62 ; U3.42 v1(2660.27,321.09) ; J2.1 2742.01,977.99 C8.1 ; U3.43 v1(2693.73,321.09) ; v1(2727.2,777.2) U3.2 ; v1(2754.46,314.89) U3.46 ; v1(2754.46,348.35) U3.47 ; v1(2754.46,381.82) U3.48 ; v1(2754.46,415.28) U3.49 ; v1(2754.46,448.75) U3.50 ; v1(2754.46,482.21) U3.51 ; v1(2754.46,515.68) U3.52 ; v1(2754.46,549.14) U3.53 ; v1(2754.46,582.61) U3.54 ; v1(2754.46,616.07) U3.55 ; v1(2754.46,649.54) U3.56 ; v1(2754.46,683) U3.57 ; v1(2754.46,716.46) U3.58 ; v1(2754.46,749.93) U3.59 ; v1(2754.46,783.39) U3.60
  L1 w20: J1.A1/B12 235.05,385.98 265.02,385.98 275,395.97 v1(275,425) ; J4.B1/A12 234.29,713.77 291.23,713.77 v1(292,713) ; J4.A1/B12 291.91,966.91 v1(292,967) ; v1(398,342) v1(461,342) ; C6.1 435,316 v1(461,342) ; C5.1 494,336.47 497.68,340.15 v1(497.68,341.23) ; C4.1 496,344 497.68,342.32 v1(497.68,341.23) ; U1.2@584.83,340 584.36,340.47 498.45,340.47 v1(497.68,341.23) ; C2.1 800.28,612 v1(810.28,602) ; U1.4 v1(900,339) ; v1(1264,498) 1264.59,498 1293.5,469.08 U4.4 ; v1(1282,850) 1293.5,861.5 U5.4 ; v1(1578,500) 1578,498.92 1606.5,470.42 U4.3 ; U5.3 1606.5,857.5 v1(1607,857) ; C17.1 1715,647 1734,628 v1(1780,628) ; v1(2060,308) 2094.45,273.55 U3.64 ; v1(2144,794) 2174.73,824.73 U3.63 ; v1@2407,614 v1(2407.1,614.1) U3.61_7 U3.61_7@2461,614.55 ; v1(2407.33,483.96) U3.61_5@2461.67,483.96 ; v1(2407.33,548.92) U3.61_6@2461.67,548.92 ; U3.61_8@2526.18,613.88 v1(2526.18,668.22) ; v1(2526.63,430.06) U3.61_4@2526.63,484.41 ; U3.61_3@2591.15,484.41 v1(2645.49,484.41) ; U3.61_2@2591.15,549.37 v1(2645.49,549.37) ; U3.61_1@2591.15,614.33 v1(2645.49,614.33) ; v1(2784,212) 2802,230 U3.65 ; v1(461,342) 461.77,341.23 v1(497.68,341.23)
  other v1: 804,160 688,162 978,336 1016,336 1054,336 937,337 978,370 1016,370 1054,370 937,371 900,373 979,405 1017,405 1055,405 938,406 901,408 2031,511 2559,516 2494,517 1297,545 2037,574 2494,582 1294,650 727,825 773,827 774,870 727,872
GPIO0: R18.2 R20.2 U3.4 | length 644
  L1 w10: R20.2 2087,850.5 2087,882.5 2159.5,882.5 2171,894 2297,894 2321,870 2622.87,870 2660.27,832.61 U3.4
GPIO1: J2.4 U3.5 | length 485.5
  L1 w10: U3.5 v1(2626.8,777.2) v1@2627,777
  L4 w10: J2.4 2387.03,1032.97 2418.03,1032.97 2454,997 2547,997 2626.8,917.2 v1(2626.8,777.2)
GPIO2: D1.1 J2.5 U3.6 | length 1781.2
  L1 w10: v1(1677,815) 1710.65,848.65 D1.1 1746,907 1831,992 2220,992 2268,1040 J2.5 ; v1@2593.34,742.41 U3.6
  L4 w10: v1(1677,815) 1680.79,815 1692.79,803 2093,803 2181,715 2565.93,715 v1(2592.93,742)
GPIO3: J2.6 U3.7 | length 609.4
  L1 w10: v1(2559.87,777.2) U3.7
  L4 w10: J2.6 2185.53,1034.47 2219.53,1034.47 2286,968 2494,968 2559.87,902.13 v1(2559.87,777.2)
GPIO4: J2.7 U3.8 | length 751.9
  L1 w10: v1(2526,742) 2526.41,742.41 U3.8
  L4 w10: J2.7 2086.53,1033.47 2118.53,1033.47 2199,953 2485,953 2526,912 v1(2526,742)
GPIO5: J2.8 U3.9 | length 749.5
  L1 w10: v1(2492.94,777.2) U3.9
  L4 w10: J2.8 1989.03,1030.97 2016.03,1030.97 2112,935 2472,935 2492.94,914.06 v1(2492.94,777.2)
GPIO6: J2.9 U3.10 | length 872.2
  L1 w10: v1@2459.48,742.41 U3.10
  L4 w10: J2.9 1885.03,1034.97 1920.03,1034.97 2038,917 2433.14,917 2459.07,891.07 v1(2459.07,742)
GPIO7: J2.10 U3.11 | length 854.4
  L1 w10: v1(2426.02,777.2) U3.11
  L4 w10: J2.10 1785.03,1034.97 1820.03,1034.97 1960,895 2397,895 2426.02,865.98 v1(2426.02,777.2)
GPIO8: J2.11 U3.12 | length 981.1
  L1 w10: v1@2392.55,742.41 U3.12